# Altium PCB PCB1.PcbDoc
Units mil, origin at the board's own origin, x right, y up, seen from the top; angles counter-clockwise.
Board outline 2960 x 1673 mil, 2 copper layers (Top Layer, Bottom Layer); 59 components, 42 nets, 179 pads, 83 vias.
Unrouted connection lines stored in the file: 1.
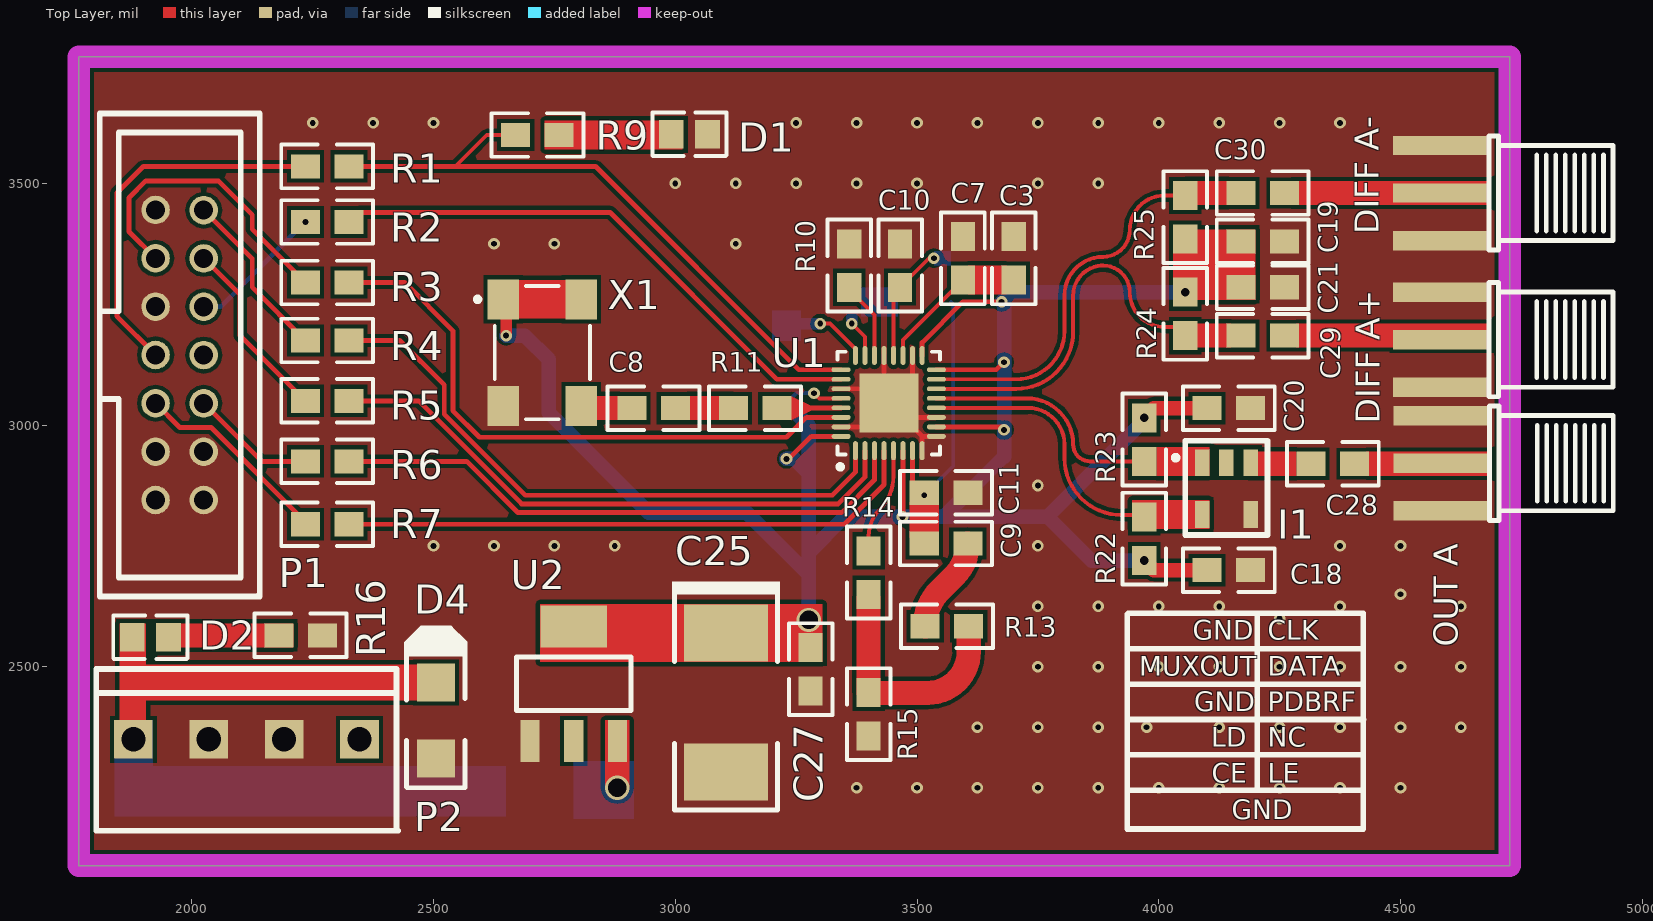
[diagram p0: Top Layer view]
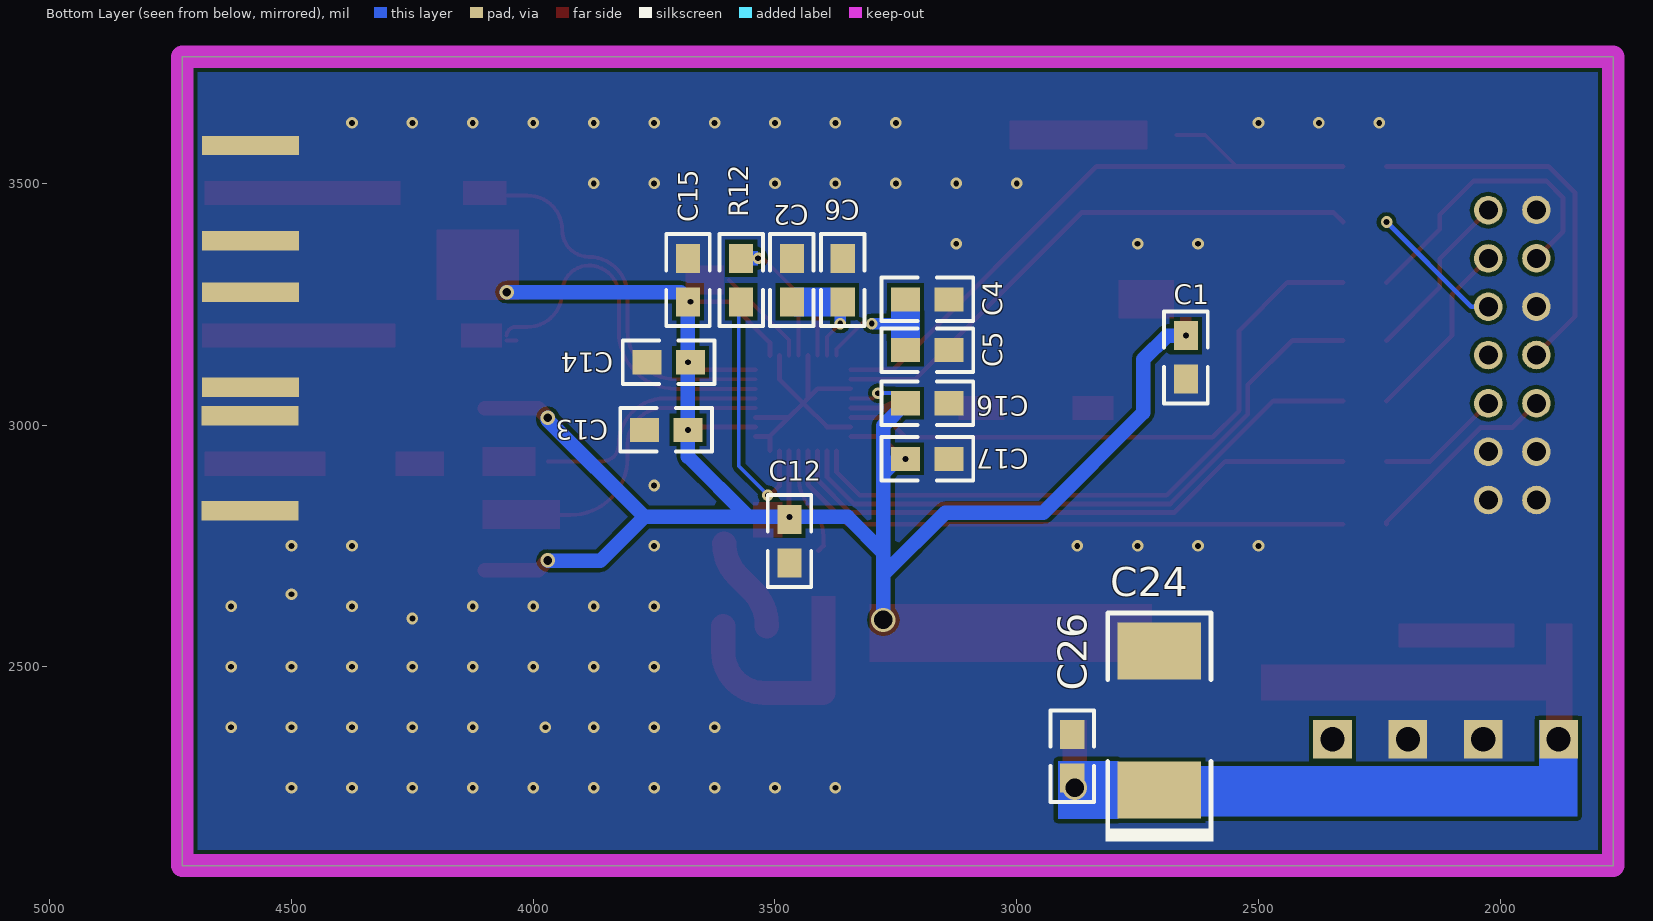
[diagram p1: Bottom Layer view, seen from below]

## Layer stack, top to bottom
Top Solder: solder mask 0.4, Solder Resist, Dk 3.5
Top Layer: signal copper 1.4
Dielectric 1: dielectric 12.6, FR-4, Dk 4.8
Bottom Layer: signal copper 1.4
Bottom Solder: solder mask 0.4, Solder Resist, Dk 3.5

## Board outline
1766,2089 1766,3762 4726,3762 4726,2089

## Design rules (kind name [scope] priority, off if disabled: settings)
Clearance [All] p1: gap=8
DiffPairsRouting [All] p1: maxlimit=10 minlimit=10 mostfreqgap=10 toplayer_minwidth=6 toplayer_maxwidth=15 toplayer_prefwidth=8 bottomlayer_minwidth=6 bottomlayer_maxwidth=15 bottomlayer_prefwidth=8 maxuncoupledlength=500
PlaneConnect [All] p1: planeconnectstyle=Direct reliefexpansion=20 reliefentries=4 reliefconductorwidth=10 reliefairgap=10
PolygonConnect [All] p1: connectstyle=Direct reliefconductorwidth=10 reliefentries=4 polygonreliefangle="90 Angle" airgapwidth=10
RoutingVias [All] p1: holewidth=28 width=50 viastyle="Through Hole" minholewidth=28 minwidth=50 maxholewidth=28 maxwidth=50
SolderMaskExpansion [All] p1: expansion=4
Width [All] p1: maxlimit=50 minlimit=6 preferedwidth=8
28 further rules are at their usual default settings.

## Classes and differential pairs
differential pair RFOUTA: +RFOUTA_P -RFOUTA_N
differential pair RFOUTB: +RFOUTB_P -RFOUTB_N

## Components (designator, comment, footprint, x,y, rotation, side; value= is the part's Value field where it differs from the comment)
C1 "0.1uf" 0805 2650,3095 r90 bottom
C2 "0.1uf" 0805 3465,3345 r270 bottom
C3 "0.1uf" 0805 3700,3390 r270 top
C4 "0.1uf" 0805 3140,3260 r0 bottom
C5 "100pf" 0805 3140,3155 r0 bottom
C6 "100pf" 0805 3360,3345 r270 bottom
C7 "100pf" 0805 3595,3390 r270 top
C8 "100pf" 0805 3000,3035 r180 top
C9 "100pf" 0805 3605,2755 r180 top
C10 "100pf" 0805 3465,3375 r270 top
C11 "100pf" 0805 3605,2860 r180 top
C12 "100pf" 0805 3470,2715 r90 bottom
C13 "100pf" 0805 3770,2990 r180 bottom
C14 "100pf" 0805 3765,3130 r180 bottom
C15 "100pf" 0805 3680,3345 r270 bottom
C16 "100pf" 0805 3140,3045 r0 bottom
C17 "100pf" 0805 3140,2930 r0 bottom
C18 "100pf" 0805 4190,2700 r180 top
C19 "100pf" 0805 4260,3380 r180 top
C20 "100pf" 0805 4190,3035 r180 top
C21 "100pf" 0805 4260,3285 r180 top
C24 "Cap" 7343C-TYPE_D 2705,2245 r270 bottom
C25 "Cap" 7343C-TYPE_D 3105,2570 r90 top
C26 "100pf" 0805 2885,2360 r270 bottom
C27 "100pf" 0805 3280,2450 r90 top
C28 "1nf" 0805 4315,2920 r0 top
C29 "1nf" 0805 4170,3185 r0 top
C30 "1nf" 0805 4170,3480 r0 top
D1 "LED" 0805_s 3050,3615 r0 top
D2 "LED" 0805_s 1935,2575 r0 top
D4 "5.6V" SMA/DO-214AC 2505,2310 r90 top
"DIFF A+" "差分输出" SMA-LYING 4644.06,3180.51 r180 top (schematic designator Vo_S2)
"DIFF A-" "差分输出" SMA-LYING 4644.06,3483.94 r180 top (schematic designator Vo_S3)
I1 "ETC1-1-13TR" SM-22 4075,2787.5 r0 top
"OUT A" "差分输出" SMA-LYING 4645,2925 r180 top (schematic designator Vo_S1)
P1 "DC-314P" DC3-14P 1809.65,3644.61 r270 top
P2 "VH3.96-4A" VH3.96-4P 1802.32,2495.67 r0 top
R1 "30R" 0805 2235,3535 r0 top
R2 "30R" 0805 2235,3420 r0 top
R3 "30R" 0805 2235,3295 r0 top
R4 "30R" 0805 2235,3175 r0 top
R5 "30R" 0805 2235,3050 r0 top
R6 "30R" 0805 2235,2925 r0 top
R7 "30R" 0805 2235,2795 r0 top
R9 "1K" 0805 2670,3600 r0 top
R10 "4.7K" 0805 3360,3285 r90 top
R11 "30R" 0805 3210,3035 r180 top
R12 "1K" 0805 3570,3255 r90 bottom
R13 "0" 0805 3607,2584 r180 top
R14 "120R" 0805 3400,2650 r90 top
R15 "360R" 0805 3400,2447 r270 top
R16 "10K" 0805 2270,2565 r180 top
R22 "49R9" 0805 3970,2810 r270 top
R23 "49R9" 0805 3970,3015 r270 top
R24 "49R9" 0805 4055,3275 r270 top
R25 "49R9" 0805 4055,3385 r90 top
U1 "ADI-ADF4351-CP-32-2" ADI-CP-32-2_M 3441.57,3045.47 r90 top
U2 "AMS1117-3.3V" SOT-223 2790,2465 r270 top
X1 "XAL-100MHZ" SMD4_7050 2725,3150 r0 top

## Footprints (in the part's own frame and the unit in brackets; to place one, negate y for a bottom-side part, rotate by r counter-clockwise, add the part's x,y. Pads: shape width x height; smd on the part's side, far side on the other; paste and mask are expansions set on the pad)
0805 [mil]
  rect 60x50 smd: 1(0,0) 2(90,0)
  silkscreen extent -50,-45 140,45
0805_s [mm]
  rect 1.3x1.499 smd: 1(0.425,-0.35) 2(-1.475,-0.35)
  silkscreen extent -2.47,-1.49 1.43,0.79
7343C-TYPE_D [mm]
  rect 3x4.4 smd: 1(0,0) 2(-7.3,0)
  silkscreen extent -9.31,-2.84 2.7,2.84
ADI-CP-32-2_M [mm] "QFN, 32-Leads, Body 5x5mm, Pitch 0.5mm, Thermal Pad 3.1x3.1mm, IPC Low Density"
  oval 1x0.25 smd: 1(-2.5,1.75) 2(-2.5,1.25) 3(-2.5,0.75) 4(-2.5,0.25) 5(-2.5,-0.25) 6(-2.5,-0.75) 7(-2.5,-1.25) 8(-2.5,-1.75) 17(2.5,-1.75) 18(2.5,-1.25) 19(2.5,-0.75) 20(2.5,-0.25) 21(2.5,0.25) 22(2.5,0.75) 23(2.5,1.25) 24(2.5,1.75)
  oval 0.25x1 smd: 9(-1.75,-2.5) 10(-1.25,-2.5) 11(-0.75,-2.5) 12(-0.25,-2.5) 13(0.25,-2.5) 14(0.75,-2.5) 15(1.25,-2.5) 16(1.75,-2.5) 25(1.75,2.5) 26(1.25,2.5) 27(0.75,2.5) 28(0.25,2.5) 29(-0.25,2.5) 30(-0.75,2.5) 31(-1.25,2.5) 32(-1.75,2.5)
  rect 3.1x3.1 smd: 33(0,0)
  silkscreen extent -3.47,-2.7 2.7,2.7, body extent -2.55,-2.55 2.55,2.55, height 1
DC3-14P [mm]
  round 1.5 hole 1: 1(5.07,2.93) 2(5.08,5.461) 3(7.61,2.93) 4(7.618,5.461) 5(10.15,2.93) 6(10.157,5.461) 7(12.69,2.93) 8(12.695,5.461) 9(15.23,2.93) 10(15.233,5.461) 11(17.77,2.93) 12(17.772,5.461) 13(20.31,2.93) 14(20.31,5.461)
  silkscreen extent 0,0 25.38,8.4
SM-22 [mil]
  rect 30x55 smd: 1(15,135) 2(65,135) 3(115,135) 4(115,27.5) 5(15,27.5)
  silkscreen extent -45,-15 150,180
SMA-LYING [mm]
  rect 5.08x1.016 smd: 0(1.5,0.1) 1(1.5,2.6) 1(1.5,-2.4)
  rect 5.08x1.016 smd far side: 1(1.5,2.6) 1(1.5,-2.4)
  silkscreen extent -7.5,-2.9 -1,3.1
SMA/DO-214AC [mm]
  rect 2x2 smd: 1(0,0) 2(4,0)
  silkscreen extent -1.52,-1.52 6.86,1.55
SMD4_7050 [mm]
  rect 1.65x2.1 smd: 1(-2.05,2.8) 2(-2.05,-2.8) 3(2.05,-2.8) 4(2.05,2.8)
  silkscreen extent -3.52,-3.5 2.5,3.5
SOT-223 [mm]
  rect 2.2x1 smd: 1(3,-2.3) 2(3,0) 3(3,2.3)
  rect 2.2x3.5 smd: 2(-3,0)
  silkscreen extent -1.4,-3 1.4,3, body extent -3.49,-3.24 3.49,3.24, height 1.64
VH3.96-4P [mil]
  rect 80x80 hole 50: 1(76.77,-145.67) 2(232.68,-145.67) 3(388.58,-145.67) 4(544.49,-145.67)
  silkscreen extent 0,-335 625,0

## Part data
C1 C2 C3 C4 C5 C6 C7 C8 C9 C10 C11 C12 C13 C14 C15 C16 C17 C18 C19 C20 C21 C26 C27 C28 C29 C30: library part Cap
C24 C25: library part "Tantalium Cap"
D4: library part 肖特基-5.6V
"DIFF A+" "DIFF A-" "OUT A": library part SMA
P1: library part DC3-14P
R1 R2 R3 R4 R5 R6 R7 R9 R10 R11 R12 R13 R14 R15 R16 R22 R23 R24 R25: library part Res
X1: library part XAL

## Via types
v1: diameter 24, hole 12, Top Layer to Bottom Layer, 78 vias
v2: diameter 30, hole 18, Top Layer to Bottom Layer, 3 vias
v3: diameter 50, hole 38, Top Layer to Bottom Layer, 2 vias

## Nets (pads, with @x,y where several pads share a name; then routed paths per layer and width w, separated by ;. In a path a pad name is that pad's centre, name@x,y a point inside that pad or via, vN(x,y) a via of type N, cw(c..) or ccw(c..) an arc to the next point about the centre after c; other vN are vias at no path point)
3.3V: C1.2 C12.2 C13.2 C14.2 C15.2 C16.2 C17.2 C18.2 C19.2 C20.2 C21.2 C25.1 C27.2 R22.2 R23.1 R24.1 R25.1 U1.6 U1.10 U1.16 U1.17 U1.28 U1.32 U2.2 X1.1 X1.4 | length 4544.8
  Top Layer w8: v1(3287,3066) 3297.69,3055.31 U1.28
  Top Layer w10: v1(3230,2930) 3235,2930 3281.57,2976.57 U1.32 ; v1(3470,2810) 3471.1,2811.1 U1.6 ; U1.17 3510.47,3170.47 3595,3255 v1(3675,3255) ; U1.10 3673.74,2996.26 v1(3680,2990) ; U1.16 3664.37,3114.37 v1(3680,3130)
  Top Layer w30: v2(3970,2720) 3990,2700 C18.2 ; v2(3970,3015) 3990,3035 C20.2
  Bottom Layer w8: C16.2 3251,3066 v1(3287,3066)
  Bottom Layer w30: v1(2650,3185) 2689,3185 2738,3136 2738,3026 2945,2819 3148,2819 3276,2691 ; v1(3230,2930) 3246,2930 3276,2900 ; C16.2 3276,2999 3276,2900 ; v3(3276,2597) 3276,2691 ; v2@3969,2719 3861,2719 3770,2810 ; v2(3970,3015) 3970,3010 3770,2810 ; v2(4055,3275) 3695,3275 v1(3675,3255) 3680,3250 v1(3680,3130) v1(3680,2990) 3680,2935 3555,2810 ; 3276,2691 3276,2736 ; 3276,2736 3350,2810 v1(3470,2810) 3555,2810 ; 3276,2736 3276,2900 ; 3555,2810 3770,2810
AGND: 
CE: R7.2 U1.4 | length 1210.9
  Top Layer w10: R7.2 3350,2795 3431.73,2876.73 U1.4
"CE D": P1.9 R7.1 | length 416.5
  Top Layer w10: P1.9 1975,2995 2040,2995 2235,2800 R7.1
CLK: R4.2 U1.1 | length 1279.8
  Top Layer w10: R4.2 2430,3175 2522,3083 2522,3022.54 2689.54,2855 3325,2855 3372.68,2902.68 U1.1
"CLK D": P1.2 R4.1 | length 356.7
  Top Layer w10: P1.2 2125,3344.25 2125,3285 R4.1
CP: C9.2 C11.2 R12.1 U1.7 | length 534.9
  Top Layer w10: U1.7 3490.79,2874.21 3505,2860 C11.2 C11.2@3520,2860
  Bottom Layer w8: v1(3515,2855) 3575,2915 3575,3250 R12.1
DATA: R5.2 U1.2 | length 1233.2
  Top Layer w10: R5.2 2469.09,3050 2682.09,2837 3337,2837 3392.36,2892.36 U1.2
"DATA D": P1.4 R5.1 | length 381.8
  Top Layer w10: P1.4 2100,3269.32 2100,3185 R5.1
DGND: 
GND: "DIFF A+.1" "DIFF A-.1" "OUT A.1" C1.1 C2.1 C3.1 C4.1 C5.1 C6.1 C7.1 C10.1 C11.1 C12.1 C13.1 C14.1 C15.1 C16.1 C17.1 C18.1 C19.1 C20.1 C21.1 C24.2 C25.2 C26.1 C27.1 D1.1 D4.1 I1.4 P1.1 P1.5 P1.11 P1.12 P1.13 P1.14 P2.2 P2.3 R10.2 R15.2 R16.1 U1.8 U1.9 U1.11 U1.18 U1.21 U1.27 U1.31 U1.33 U2.1 X1.2 | length 662.2
  Top Layer w10: U1.31 3392.36,2996.26 U1.33 ; U1.27 3412.05,3075 U1.33@3431.73,3055.31 ; U1.21 U1.33@3431.73,3055.31 ; U1.18 3490.79,3094.68 U1.33 ; U1.8 3510.47,2976.57 ; U1.9 3510.47,2976.57 ; U1.11 U1.33@3471.1,3015.94 ; U1.33@3431.73,3055.31 U1.33 ; U1.33 U1.33@3471.1,3015.94 ; U1.33@3471.1,3015.94 3510.47,2976.57
  other v1: 3375,2250 3500,2250 3625,2250 3750,2250 3875,2250 4000,2250 4125,2250 4250,2250 4375,2250 4500,2250 3625,2375 3750,2375 3875,2375 3975,2375 4125,2375 4250,2375 4375,2375 4500,2375 4625,2375 3750,2500 3875,2500 4000,2500 4125,2500 4250,2500 4375,2500 4500,2500 4625,2500 4250,2600 3750,2625 3875,2625 4000,2625 4125,2625 4375,2625 4625,2625 4500,2650 2500,2750 2625,2750 2750,2750 2875,2750 3750,2750 4375,2750 4500,2750 3750,2875 2625,3375 2750,3375 3125,3375 3000,3500 3125,3500 3250,3500 3375,3500 3500,3500 3750,3500 3875,3500 2250,3625 2375,3625 2500,3625 3250,3625 3375,3625 3500,3625 3625,3625 3750,3625 3875,3625 4000,3625 4125,3625 4250,3625 4375,3625
LD: R1.2 R9.1 U1.25 | length 1344.3
  Top Layer w8: 2545,3535 2610,3600 R9.1
  Top Layer w10: R1.2 2545,3535 2835,3535 3255.63,3114.37 U1.25
"LD D": P1.7 R1.1 | length 780.9
  Top Layer w10: P1.7 1845,3225 1845,3480 1900,3535 R1.1
LE: R6.2 U1.3 | length 1219.4
  Top Layer w10: R6.2 2568.63,2925 2674.63,2819 3344.46,2819 3412.05,2886.59 U1.3
"LE D": P1.10 R6.1 | length 260
  Top Layer w10: P1.10 2144.51,2925 R6.1
MUXOUT: R3.2 U1.30 | length 1264.3
  Top Layer w10: R3.2 2440,3295 2540,3195 2540,3030 2595,2975 3230,2975 3270.94,3015.94 U1.30
"MUXOUT D": P1.3 R3.1 | length 631.8
  Top Layer w10: P1.3 1870,3400 1870,3470 1905,3505 2055,3505 2125,3435 2125,3405 R3.1
NetC8_1: C8.1 R11.2
NetC8_2: C8.2 X1.3
NetC9_1: C9.1 R13.2 | length 199.1
  Top Layer w50: R13.2 3517,2586.58 cw(c3617,2586.58) 3546.29,2657.29 3577.42,2688.42 ccw(c3510.85,2755) C9.1
NetC24_1: C24.1 C26.2 D2.2 D4.2 P2.1 U2.3
  other v3: 2880,2250
NetC28_1: C28.1 I1.3
NetC28_2: "OUT A.0" C28.2
NetC29_2: "DIFF A+.0" C29.2
NetC30_2: "DIFF A-.0" C30.2
NetD1_2: D1.2 R9.2
NetD2_1: D2.1 R16.2
NetR13_1: R13.1 R14.1 R15.1 | length 309.1
  Top Layer w50: R15.1 ccw(c3401,2447) 3401,2446 3522,2446 ccw(c3522,2531) 3607,2531 R13.1
PDBRF: R2.2 U1.26 | length 1169.5
  Top Layer w10: R2.2 2345,3440 2865,3440 3210.32,3094.68 U1.26
"PDBRF D": P1.6 R2.1 | length 283
  Bottom Layer w10: P1.6 2059.74,3244.74 v1(2235,3420)
PGND: 
REFIN: R11.1 U1.29 | length 133.4
  Top Layer w10: R11.1 3210.63,3035.63 U1.29
RFOUTA_N: I1.1 R23.2 U1.13 | length 504.4
  Top Layer w8: U1.13 3727.69,3055.31 cw(c3727.69,2960) 3823,2960 ccw(c3858,2960) 3858,2925 R23.2
RFOUTA_P: I1.5 R22.1 U1.12 | length 569.6
  Top Layer w8: U1.12 3729.37,3035.63 cw(c3729.37,2960) 3805,2960 3805,2932 ccw(c3923,2932) 3923,2814 3960.34,2814 cw(c3960.34,2800.34) R22.1
RFOUTB_N: C30.1 R25.2 U1.15 | length 763.5
  Top Layer w8: U1.15 3705,3094.68 ccw(c3705,3194.68) 3805,3194.68 3805,3268 cw(c3885,3268) 3885,3348 ccw(c3885,3403) 3940,3403 cw(c4012,3403) 4012,3475 R25.2
RFOUTB_P: C29.1 R24.2 U1.14 | length 802.8
  Top Layer w8: U1.14 3705,3075 ccw(c3705,3193) 3823,3193 3823,3268 cw(c3885,3268) 3882.42,3329.95 ; R24.2@4035,3175 R24.2@4055,3175 ; R24.2 ccw(c4037,3185) 4037,3203 4012,3203 cw(c4012,3275) 3940,3275 ccw(c3885,3275) 3885,3330 ccw(c3885,3268) 3882.42,3329.95 ; 3880,3330 cw(c3880,3275) 3882.42,3329.95 ; 3880,3330 cw(c3880,3275) 3882.42,3329.95 ; 3880,3330 cw(c3880,3275) 3882.42,3329.95
RSET: R10.1 U1.22 | length 136.4
  Top Layer w8: R10.1@3375,3265 3412.05,3227.95 U1.22
SW: R14.2 U1.5 | length 224.9
  Top Layer w8: R14.2@3400,2750 3400,2770.71 cw(c3475.55,2770.71) 3422.13,2824.13 ccw(c3351.42,2894.84) 3451.42,2894.84 U1.5
  Top Layer w10: R14.2@3400,2750 R14.2@3410,2740
TEMP: C3.2 C7.2 U1.19 | length 207.4
  Top Layer w8: U1.19 3471.1,3176.1 C7.2
VCOM: C2.2 C6.2 U1.23 | length 77.4
  Top Layer w8: v1(3365,3210) 3392.36,3182.64 U1.23
VREF: C4.2 C5.2 U1.24 | length 107.9
  Top Layer w8: v1(3300,3210) 3320,3210 3372.68,3157.32 U1.24
VTUNE: C10.2 R12.2 U1.20 | length 241.6
  Top Layer w8: U1.20 3451.42,3271.42 C10.2 3525,3345 v1(3535,3345)
pads on no net: I1.2 P1.8 P2.4

## Polygon pours and split planes (outlines as drawn)
GND on Top Layer "Top Layer-No Net" (solid, pour order 8): 1766,2089 4726,2089 4726,3762 1766,3762
GND on Bottom Layer "Top Layer-No Net" (solid, pour order 10): 1766,3762 1766,2089 4726,2089 4726,3762

## Keep-outs
Keep-Out Layer:
  the board outline again, w47.24

## Other copper
Top Layer:
  rectangle net TEMP: 3605,3270 3685,3330
  rectangle net 3.3V: 3190,2510 3305,2630
  rectangle net 3.3V: 2720,2510 3190,2630
  rectangle net NetC24_1: 2855,2250 2905,2390
  rectangle net NetC24_1: 1865,2430 2495,2505
  rectangle net NetD2_1: 1970,2540 2210,2590
  rectangle net NetC24_1: 1850,2355 1905,2590
  rectangle net RFOUTB_P: 4065,3160 4150,3210
  rectangle net RFOUTB_N: 4055,3455 4145,3505
  rectangle net NetC28_2: 4430,2895 4680,2945
  rectangle net NetC28_1: 4185,2895 4285,2945
  rectangle net NetC8_1: 3025,3010 3120,3060
  rectangle net NetC8_2: 2800,3010 2885,3060
  rectangle net 3.3V: 2675,3220 2790,3300
  rectangle net NetC30_2: 4275,3455 4680,3505
  rectangle net NetC29_2: 4285,3160 4685,3210
  rectangle net RFOUTA_P: 3945,2785 4105,2845
  rectangle net RFOUTA_N: 3995,2895 4105,2955
  rectangle net NetD1_2: 2730,3570 3015,3630
  rectangle net 3.3V: 2638,3185 2662,3224
  rectangle net 3.3V: 4030,3259 4200,3405
  rectangle net CP: 3485,2767 3545,2841
  rectangle net NetR13_1: 3375,2447 3425,2646
  region net REFIN: 3240,3060 3280,3040 3280,3030 3240,3010
Bottom Layer:
  rectangle net VTUNE: 3535,3330 3570,3360
  rectangle net NetC24_1: 2790,2185 2915,2305
  rectangle net NetC24_1: 1920,2190 2650,2295
  rectangle net NetC24_1: 1840,2190 1920,2390
  rectangle net VREF: 3200,3174 3260,3237
  rectangle net VCOM: 3384,3225 3461,3285
  rectangle net VREF: 3255,3198 3300,3222
  rectangle net VCOM: 3353,3209 3377,3235

## Silkscreen, mask and mechanical layers (free items; w line width, h text height)
Top Overlay:
  lines w11.81: 3936,2537.34 4423,2537.34 ; 3937,2244.68 4205,2244.68 4420.96,2244.68 ; 3937,2464.17 4422,2464.17 ; 3937,2610.5 3935,2608.5 3935,2177.5 3935,2164.5 4423,2164.5 4423,2177.5 4423,2610.5 4208,2610.5 3940,2610.5 ; 3938,2317.84 4423,2317.84 ; 3941,2391.01 4424,2391.01 ; 4204,2244.68 4204,2610.5
  text "GND" at 4069.96,2555.5 h40
  text "CLK" at 4225,2555.5 h40
  text "MUXOUT" at 3959.96,2481.75 h40
  text "DATA" at 4225,2481.75 h40
  text "GND" at 4073.96,2408 h40
  text "PDBRF" at 4225,2408 h40
  text "LD" at 4108.96,2334.25 h40
  text "NC" at 4225,2334.25 h40
  text "CE" at 4109.96,2260.5 h40
  text "LE" at 4225,2260.5 h40
  text "GND" at 4150.96,2184.5 h40